# EAGLE board transceiver (2) (EAGLE 6.4)
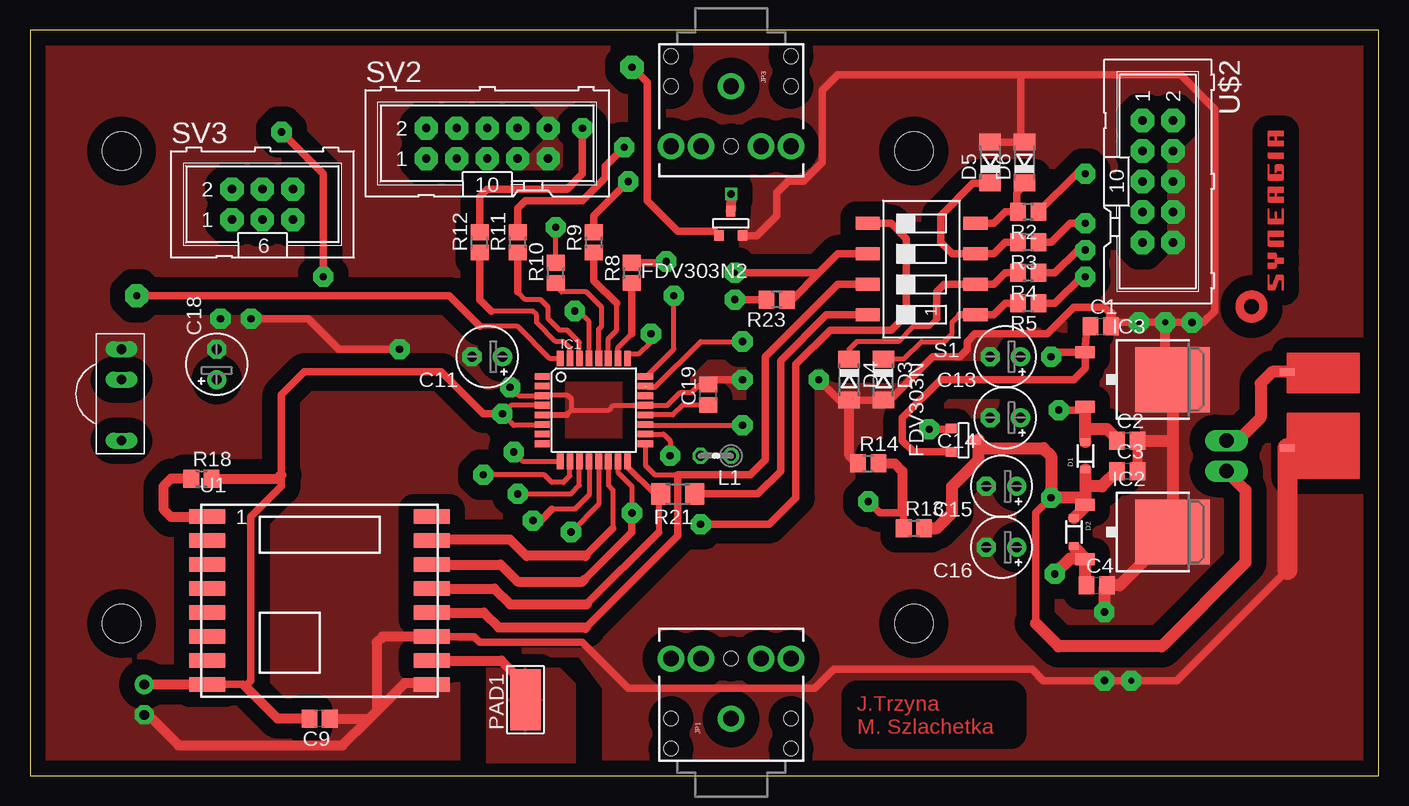
[diagram p0: board, top side]
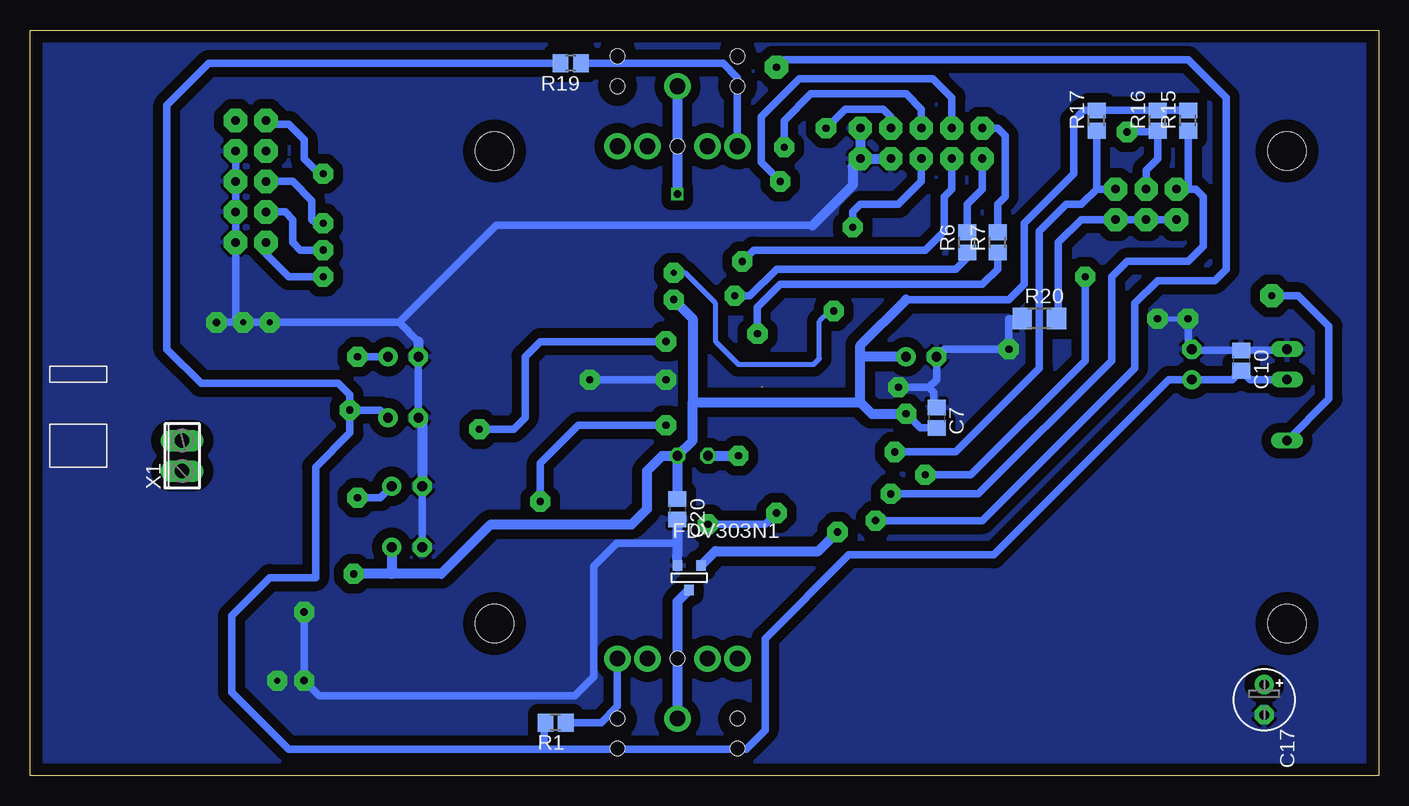
[diagram p1: board, bottom side, seen from below]

Size 112.38 x 62.15 mm. Coordinates in mm from the lower left corner, seen from the top.
Outline: 0,0 112.38,0 112.38,62.15 0,62.15 0,0
Copper layers (1*16): Top 0.035mm / dielectric 1.5mm / Bottom 0.035mm
Design rules "default": minimum track width 10mil, minimum drill 24mil, track to track 8mil, track to pad 8mil, pad to pad 8mil, via to via 8mil, smd to smd 8mil, copper to edge 40mil, drill to drill 8mil, minimum pad ring 10mil, minimum via ring 8mil, stop-mask expansion 4mil, vias tented up to drill 0mil, thermal gap 10mil
Holes 3.2 mm at 7.62,52.07 7.62,12.7 73.66,12.7 73.66,52.07

## Footprints (pad centres in the part's own frame; a part is rotated, then mirrored left to right if it is on the bottom)
C0805 = smd 1.3 x 1.5: 1 -0.85,0; 2 0.85,0
E2,5-5 = drill 0.813 pad 1.6: + -1.27,0 | drill 0.813 pad 1.6 octagon: - 1.27,0
SOD-323 = smd 0.63 x 0.83: 1 -1.15,0; 2 1.15,0
SOD80C = smd 1.4 x 1.8: A 1.7,0; C -1.7,0
SOT-23 = smd 0.787 x 0.889: 1 0.025,-1.016; 2 -0.94,1.016; 3 0.991,1.016
TQFP32-08 = smd 1.27 x 0.559: 1 -4.293,2.8; 2 -4.293,2; 3 -4.293,1.2; 4 -4.293,0.4; 5 -4.293,-0.4; 6 -4.293,-1.2; 7 -4.293,-2; 8 -4.293,-2.8; 17 4.293,-2.8; 18 4.293,-2; 19 4.293,-1.2; 20 4.293,-0.4; 21 4.293,0.4; 22 4.293,1.2; 23 4.293,2; 24 4.293,2.8 | smd 0.559 x 1.27: 9 -2.8,-4.293; 10 -2,-4.293; 11 -1.2,-4.293; 12 -0.4,-4.293; 13 0.4,-4.293; 14 1.2,-4.293; 15 2,-4.293; 16 2.8,-4.293; 25 2.8,4.293; 26 2,4.293; 27 1.2,4.293; 28 0.4,4.293; 29 -0.4,4.293; 30 -1.2,4.293; 31 -2,4.293; 32 -2.8,4.293
TO252 = smd 1 x 1.6: 1 -2.28,-4.8; 2 2.28,-4.8 | smd 5.4 x 6.2: 3 0,2.5
AUDIO-JACK = drill 1.3 pad 2.184: RING 5,5; RSH 5,2.5; SLEEVE 0,0; TIP 5,-5; TSH 5,-2.5 | hole 1.2: 0,5; -2.5,5; -2.5,-5; 0,-5; 5,0
0204V = drill 0.813 octagon: 1 -1.27,0; 2 1.27,0
5-2,5 = smd 2.54 x 5.08: 1 0,0
R0805 = smd 1.3 x 1.5: 1 -0.85,0; 2 0.85,0
R1206 = smd 1.6 x 1.803: 1 -1.422,0; 2 1.422,0
SMS-004 = smd 1.092 x 2.007: 1 -3.81,-4.496; 2 -1.27,-4.496; 3 1.27,-4.496; 4 3.81,-4.496; 5 3.81,4.496; 6 1.27,4.496; 7 -1.27,4.496; 8 -3.81,4.496
ML10 = drill 0.7 pad 1.93 octagon: 1 -5.08,-1.27; 2 -5.08,1.27; 3 -2.54,-1.27; 4 -2.54,1.27; 5 0,-1.27; 6 0,1.27; 7 2.54,-1.27; 8 2.54,1.27; 9 5.08,-1.27; 10 5.08,1.27
ML6 = drill 0.7 pad 1.93 octagon: 1 -2.54,-1.27; 2 -2.54,1.27; 3 0,-1.27; 4 0,1.27; 5 2.54,-1.27; 6 2.54,1.27
LED5MM = drill 0.813 octagon: A -1.27,0; K 1.27,0
TSOP17XX = drill 0.813 long: GND -3.81,0; OUT 3.81,0; V+ -1.27,0
RFM69W-XXXS2 = smd 3 x 1.2: 1 -9.35,7; 2 -9.35,5; 3 -9.35,3; 4 -9.35,1; 5 -9.35,-1; 6 -9.35,-3; 7 -9.35,-5; 8 -9.35,-7; 9 9.35,-7; 10 9.35,-5; 11 9.35,-3; 12 9.35,-1; 13 9.35,1; 14 9.35,3; 15 9.35,5; 16 9.35,7
DEANSM = smd 1.27 x 0.635: P$NEG 3.175,3.81; P$POS 3.175,-2.54
2POL254 = drill 1.2 long: 1 -1.27,0; 2 1.27,0

## Placement (x,y rotation side)
C1  [C0805]  89.22,37.46 0 top
C2  [C0805]  91.44,27.94 0 top
C3  [C0805]  91.44,25.4 0 top
C4  [C0805]  88.9,15.88 0 top
C7  [C0805]  36.83,29.84 270 bottom
C9  [C0805]  24.13,4.76 180 top
C10  [C0805]  11.43,34.61 270 bottom
C11  [E2,5-5]  38.1,34.92 180 top
C13  [E2,5-5]  81.28,34.92 180 top
C14  [E2,5-5]  81.28,29.84 180 top
C15  [E2,5-5]  80.96,24.13 180 top
C16  [E2,5-5]  80.96,19.05 180 top
C17  [E2,5-5]  9.53,6.35 270 bottom
C18  [E2,5-5]  15.56,34.29 90 top
C19  [C0805]  56.52,31.75 90 top
C20  [C0805]  58.42,22.22 270 bottom
D1  BAS16HT1G  [SOD-323]  87.95,26.67 90 top
D2  BAS16HT1G  [SOD-323]  87,20.32 270 top
D3  [SOD80C]  71.12,33.02 270 top
D4  [SOD80C]  68.26,33.02 270 top
D5  [SOD80C]  80.01,51.12 90 top
D6  [SOD80C]  82.87,51.12 90 top
FDV303N  [SOT-23]  77.79,27.94 90 top
FDV303N1  [SOT-23]  57.47,16.51 0 bottom
FDV303N2  [SOT-23]  58.42,46.04 180 top
IC1  MEGA8-AI  [TQFP32-08]  46.99,30.48 0 top
IC2  LF33  [TO252]  92.71,20.32 270 top
IC3  LF50  [TO252]  92.71,33.02 270 top
JP1  [AUDIO-JACK]  58.42,4.76 90 top
JP2  [AUDIO-JACK]  23.5,75.25 0 top  (outside the outline)
JP3  [AUDIO-JACK]  58.42,57.47 270 top
L1  [0204V]  57.15,26.67 180 top
PAD1  WIREPADSMD5-2,5  [5-2,5]  41.27,6.35 0 top
R1  36,5R  [R0805]  68.58,4.45 180 bottom
R2  [R0805]  83.19,46.99 180 top
R3  [R0805]  83.19,44.45 180 top
R4  [R0805]  83.19,41.91 180 top
R5  [R0805]  83.19,39.37 180 top
R6  1.2k  [R0805]  34.29,44.45 90 bottom
R7  1.2k  [R0805]  31.75,44.45 90 bottom
R8  1.2k  [R0805]  50.16,41.91 90 top
R9  1.2k  [R0805]  46.99,44.45 90 top
R10  1.2k  [R0805]  43.81,41.91 90 top
R11  1,2k  [R0805]  40.64,44.45 90 top
R12  1.2k  [R0805]  37.47,44.45 90 top
R13  10k  [R0805]  73.66,20.64 0 top
R14  3,6k  [R0805]  69.85,26.04 0 top
R15  10k  [R0805]  15.88,54.61 90 bottom
R16  10k  [R0805]  18.41,54.61 90 bottom
R17  10k  [R0805]  23.5,54.61 90 bottom
R18  10k  [R0805]  14.29,24.77 0 top
R19  [R0805]  67.31,59.37 180 bottom
R20  0R  [R1206]  28.26,38.1 0 bottom
R21  0R  [R1206]  53.98,23.49 180 top
R23  1k  [R0805]  62.23,39.69 180 top
S1  SWS004  [SMS-004]  74.3,42.23 90 top
SV2  [ML10]  38.1,52.7 0 top
SV3  [ML6]  19.37,47.62 0 top
TSAL6200  [LED5MM]  41.27,72.71 0 top  (outside the outline)
TSOP  TSOP1736  [TSOP17XX]  7.62,31.75 270 top
U1  RFM69HW  [RFM69W-XXXS2]  24.13,14.61 0 top
U$1  DEANS.MALE  [DEANSM]  107.95,31.11 180 top
U$2  [ML10]  93.98,49.53 270 top
U$3  [SYNERGIA_16MM]  104.46,37.78 90 top
X1  [2POL254]  99.69,26.67 90 bottom

## Library data of the parts
C1-C4 C7 C9 C10 C19 C20 L1 R1-R19 R23 = resistor
C11 C13-C18 R20 R21 = rcl
D1 D2 = SparkFun
D3-D6 = diode
FDV303N FDV303N1 FDV303N2 = zetex; OC_FARNELL: unknown; OC_NEWARK: unknown
IC1 = atmel; MPN: ATMEGA8-16AU; OC_FARNELL: 9171371; OC_NEWARK: 73M8863
IC2 IC3 = linear
JP1-JP3 = SparkFun-Connectors
PAD1 = wirepad
S1 = smd-special
SV2 SV3 U$2 = con-harting-ml; OC_FARNELL: unknown; OC_NEWARK: unknown
TSAL6200 = led
TSOP = tsop
U1 = SparkFun-RF
U$1 = bt_electromech
U$3 = synergia_logo
X1 = con-phoenix-254; OC_FARNELL: unknown; OC_NEWARK: unknown

## Nets
5V_ENABLE: FDV303N.3 IC1.23
+3V3: C4.1 C7.2 C9.2 C11.+ C16.+ C17.+ C20.1 D2.2 IC1.4 IC1.6 IC2.2 L1.1 R15.2 R16.2 R17.2 R18.2 R23.2 U1.8
+5V: C2.1 C10.2 C14.+ C18.+ D1.2 IC3.2 R1.2 R19.2 TSOP.V+
ADC: IC1.19 R13.1 R14.2
GND: C1.2 C2.2 C3.2 C4.2 C7.1 C9.1 C10.1 C11.- C13.- C14.- C15.- C16.- C17.- C18.- C19.2 C20.2 D3.A D4.A D5.A D6.A FDV303N1.2 FDV303N2.2 IC1.3 IC1.5 IC1.21 IC2.3 IC3.3 R14.1 R20.1 SV2.7 SV2.9 SV2.10 TSOP.GND U1.9 U1.11 U$1.P$NEG U$2.4 U$2.6 U$2.8 U$2.10
LED1: IC1.24 R6.1
LED2: IC1.25 R7.1
LED3: IC1.26 R8.1
LED4: IC1.27 R9.1
LED5: IC1.28 R10.1
LED_BATT_GR: IC1.30 R11.1
LED_BATT_RED: IC1.31 R12.1
LED_STRIPE: FDV303N2.3 IC1.12
MISO: IC1.16 R21.2 U1.13
MOSI: IC1.15 S1.5 U1.14
N$1: C1.1 C13.+ FDV303N.2 IC3.1
N$2: IC1.18 L1.2
N$3: JP2.TIP TSAL6200.A
N$4: R2.1 U$2.1
N$5: R3.1 U$2.5
N$6: R4.1 U$2.7
N$7: R5.1 U$2.9
N$8: JP1.TIP R1.1
N$9: R6.2 SV2.1
N$10: R7.2 SV2.2
N$11: R8.2 SV2.3
N$12: R9.2 SV2.4
N$13: R10.2 SV2.5
N$14: FDV303N1.1 JP1.SLEEVE
N$15: FDV303N2.1 JP3.SLEEVE
N$16: R11.2 SV2.6
N$17: R12.2 SV2.8
N$19: U$1.P$POS X1.2
N$20: JP3.TIP R19.1
N$21: R18.1 U1.1
N$22: JP2.SLEEVE TSAL6200.K
N$23: R20.2 SV3.1 SV3.3 SV3.5
N$24: R21.1 S1.8
N$26: C19.1 IC1.20
N$27: C3.1 C15.+ D1.1 D2.1 FDV303N.1 IC2.1 R13.2 X1.1
N$28: PAD1.1 U1.10
N$29: D6.C R2.2 S1.4
N$30: D5.C R3.2 S1.3
N$31: D4.C R4.2 S1.2
N$32: D3.C R5.2 S1.1
RESET: IC1.29 R23.1 S1.6
SCK: IC1.17 S1.7 U1.12
SS: IC1.14 U1.15
SWITCH_DOWN: IC1.11 R15.1 SV3.2
SWITCH_OK: IC1.10 R16.1 SV3.4
SWITCH_UP: IC1.9 R17.1 SV3.6
TSAL_ENABLE: FDV303N1.3 IC1.13
TSOP_OUT: IC1.32 TSOP.OUT

## Tracks (layer width: path | path; a pad name or v marks a point on that pad's centre or on a via)
5V_ENABLE  (via drill 0.6 pad 1.68)  (1 unrouted)
  Top 0.254: 51.38,32.38 51.44,32.38
  Top 0.406: 51.44,32.38 52.07,32.38 55.88,36.2 v59.37,36.2
  Top 0.61: FDV303N.3 76.73,28.89 v74.93,28.89
  Bottom 0.61: v59.37,36.2 69.85,36.2 71.12,34.92 71.12,29.84 72.07,28.89 v74.93,28.89
+3V3  (via drill 0.6 pad 1.68)
  Top 0.254: 14.79,7.62 U1.8
  Top 0.305: 87.91,18.25 IC2.2 | IC1.6 42.63,29.21
  Top 0.406: 42.63,29.21 40.32,29.21 v39.37,30.16 40.09,30.88 IC1.4
  Top 0.61: 14.79,7.62 17.78,7.62 17.94,7.46 18.41,7.94 18.41,21.59 20.95,24.13 20.95,25.08 20.95,31.75 22.86,33.66 34.29,33.66 37.78,30.16 v39.37,30.16 | 87.91,16.02 C4.1 | D2.2 87,18.95 | 87,18.95 IC2.2 | 87,18.95 87.09,18.95 | R23.2 v58.74,39.69
  Top 0.813: C9.2 20.64,4.76 17.94,7.46 | C17.+ 14.45,7.62 U1.8 | R18.2 20.64,24.77 20.95,25.08
  Top 1.016: IC2.2 87.91,16.02 | 87.09,18.95 87.95,18.1 86.68,18.1 v85.41,16.83
  Bottom 0.61: C7.2 38.2,28.99 v39.37,30.16 | 39.37,39.69 30.8,39.69 29.53,40.96 29.53,46.04 25.4,50.16 25.4,54.61 24.55,55.46 R17.2 R16.2 R15.2
  Bottom 0.813: L1.1 59.69,26.67 60.96,25.4 60.96,22.22 62.23,20.95 73.98,20.95 78.11,16.83 82.23,16.83 | L1.1 C20.1 | v58.74,39.69 57.15,38.1 57.15,31.11 | 43.18,31.11 42.23,30.16 v39.37,30.16 | 57.15,31.11 43.18,31.11 | L1.1 57.15,27.94 57.15,31.11 | 82.23,16.83 v85.41,16.83 | C16.+ 82.23,16.83 | 43.18,31.11 43.18,34.92 | 43.18,34.92 43.18,35.88 39.37,39.69 | C11.+ 43.18,34.92
+5V  (via drill 0.6 pad 1.68)
  Top 0.254: IC3.2 87.65,30.48 | 90.59,28.06 C2.1
  Top 0.61: v85.72,30.48 87.65,30.48 arc90 IC3.2 arc90 87.95,30.78
  Top 1.016: D1.2 87.95,28.89 | 87.95,28.89 87.95,30.78 | 90.59,28.06 89.76,28.89 87.95,28.89
  Bottom 0.61: C14.+ 83.19,30.48 v85.72,30.48 | v85.72,30.48 85.72,28.57 88.58,25.72 88.58,16.51 92.39,16.51 95.57,13.34 95.57,6.99 90.81,2.22 69.53,2.22 | v85.72,30.48 85.72,31.75 86.68,32.7 98.11,32.7 100.97,35.56 100.97,55.88 97.47,59.37 R19.2 | 69.53,2.22 52.7,2.22 51.12,3.81 51.12,11.43 44.13,18.41 32.07,18.41 17.46,33.02 C18.+ 12.17,33.02 C10.2 10.69,33.02 TSOP.V+ | R1.2 69.53,4.23 69.53,2.22
ADC  (via drill 0.6 pad 1.68)
  Top 0.305: IC1.19 51.35,29.21
  Top 0.406: 51.35,29.21 v59.37,29.21
  Top 0.61: R13.1 72.81,21.91 72.71,21.91 70.8,21.91 v69.85,22.86
  Top 0.813: 72.71,21.91 72.71,25.4 72.07,26.04 R14.2
  Bottom 0.61: v69.85,22.86 69.85,26.04 66.67,29.21 v59.37,29.21
GND  (via drill 0.5 pad 1.68, 0.6 pad 1.68)
  Top 0.254: 90.13,16.51 C4.2 | 40.64,31.75 40.71,31.68
  Top 0.305: 93.94,20.32 IC2.3 | IC3.3 95.21,31.75 | C19.2 56.73,33.02
  Top 0.406: 40.71,31.68 IC1.3 | 40.64,31.75 v40.01,32.38 | 45.09,30.48 48.26,30.48 48.66,30.88 IC1.21 53.1,30.88 54.19,31.96 55.14,31.96 55.78,32.6 | 44.69,30.08 44.77,30.16 45.09,30.48 | 42.77,31.75 44.77,31.75 45.09,31.43 45.09,30.48 | 46.99,10.16 47.31,9.84
  Top 0.508: IC1.5 44.77,30.08 44.77,30.16 | 42.77,31.75 IC1.3
  Top 0.61: 93.94,20.32 93.94,19.01 | 90.07,38.52 89.53,39.05 87,39.05 84.77,36.83 78.74,36.83 78.11,36.2 78.11,35.56 77.47,34.92 75.25,34.92 71.64,31.32 D3.A D4.A 67.42,31.32 v65.72,33.02 | D5.A D6.A 82.55,52.82 82.55,58.42 | 89.75,37.78 89.85,37.78 v92.39,37.78 v94.61,37.78 v96.84,37.78 97.79,37.78 98.74,38.73 98.74,55.56 95.89,58.42 82.55,58.42 | v30.8,35.56 25.72,35.56 23.18,38.1 v18.41,38.1 | 56.73,33.02 v59.37,33.02 | 104.78,17.14 95.57,7.94 v91.76,7.94 v89.53,7.94 84.45,7.94 83.5,8.89 66.99,8.89 65.41,7.3 49.85,7.3 47.31,9.84 46.04,11.11 37.47,11.11 36.97,11.61 U1.11 | FDV303N2.2 60.58,45.02 62.23,46.67 62.23,48.58 63.18,49.53 64.45,49.53 66.04,51.12 66.04,57.15 67.31,58.42 82.55,58.42
  Top 0.813: C9.1 28.26,4.76 | C17.- 9.84,5.08 12.38,2.54 26.04,2.54 28.26,4.76 | 28.89,5.4 31.22,7.72 33.36,7.72 U1.9 | U1.11 29.39,11.61 28.89,11.11 28.89,5.4 | 28.89,5.4 28.26,4.76 | R14.1 68.26,26.77 D4.A | 90.07,38.52 C1.2 89.85,37.68 89.85,37.78 | IC3.3 94.61,33.62 v94.61,37.78 | C2.2 C3.2
  Top 1.016: 93.94,19.01 90.81,15.88 C4.2 | 95.21,31.75 95.21,27.94 | 95.21,27.94 95.21,20 | C2.2 95.21,27.94 | 89.53,15.66 v89.53,13.65
  Top 1.676: U$1.P$NEG 104.78,17.14
  Bottom 0.305: 37.05,30.7 C7.1 36.83,30.48
  Bottom 0.406: v18.41,38.1 v15.88,38.1
  Bottom 0.61: C15.- C16.- | C13.- C14.- 79.69,30.16 | U$2.4 U$2.6 U$2.8 U$2.10 95.25,37.78 | 95.25,37.78 v94.61,37.78 v92.39,37.78 81.6,37.78 | 95.25,37.78 v96.84,37.78 | 80.01,36.2 81.6,37.78 | v40.01,32.38 37.47,32.38 | 37.47,32.38 36.83,33.02 C11.- 36.2,35.56 v30.8,35.56 30.8,38.1 R20.1 | 37.05,30.7 37.05,31.96 37.47,32.38 | v59.37,33.02 v65.72,33.02 | v89.53,13.65 v89.53,7.94 88.27,6.67 66.99,6.67 65.41,8.25 65.41,17.46 63.5,19.37 58.42,19.37 | TSOP.GND 7.72,35.46 C10.1 15.46,35.46 C18.- 15.88,35.88 v15.88,38.1 | 47.15,45.88 73.5,45.88 81.6,37.78
  Bottom 0.813: SV2.10 SV2.9 | SV2.9 43.81,50.8 43.81,49.21 47.15,45.88 | SV2.9 SV2.7 | C14.- 79.69,29.53 C15.- | 80.01,36.2 C13.- | FDV303N1.2 58.42,18.47 58.42,19.37 C20.2
  pour Bottom (isolate 0.813): 0,62.55 113.03,62.23 112.71,0 0,0
  pour Top (isolate 1.27, no thermals): -1.59,64.14 -1.59,-2.22 117.16,-1.59 117.16,63.18
LED1  (via drill 0.6 pad 1.68)
  Top 0.305: IC1.24 51.38,33.28
  Top 0.406: 51.38,33.28 53.66,35.56 v53.66,40.01
  Bottom 0.406: R6.1 34.29,43.18
  Bottom 0.61: 34.29,43.18 35.24,42.23 50.16,42.23 52.39,40.01 v53.66,40.01
LED2  (via drill 0.6 pad 1.68)
  Top 0.305: IC1.25 49.79,35.19
  Top 0.406: 49.79,35.19 50.74,35.19 51.75,36.2 v51.75,36.83
  Bottom 0.61: v51.75,36.83 51.75,39.05 49.85,40.96 33.02,40.96 31.75,42.23 R7.1
LED3
  Top 0.406: IC1.26 48.99,35.66 50.16,36.83
  Top 0.61: 50.16,36.83 R8.1
LED4
  Top 0.406: IC1.27 48.19,36.44 48.9,37.15 48.9,39.37
  Top 0.61: 48.9,39.37 46.99,41.27 R9.1
LED5
  Top 0.406: R10.1 43.88,40.74 44.3,40.32 46.35,40.32 47.62,39.05 47.62,37.46 47.39,37.23 IC1.28
LED_BATT_GR
  Top 0.406: IC1.30 45.79,36.12 44.77,37.15 44.13,37.15 43.18,38.1 43.18,39.05 42.55,39.69 41.27,39.69 40.64,40.32
  Top 0.61: 40.64,40.32 R11.1
LED_BATT_RED
  Top 0.406: IC1.31 44.99,35.66 44.45,36.2 43.81,36.2 42.23,37.78 42.23,38.42 41.91,38.73 38.42,38.73
  Top 0.61: R12.1 37.47,39.69 38.42,38.73
LED_STRIPE  (via drill 0.6 pad 1.68, 0.6 pad 1.93)
  Top 0.406: IC1.12 46.59,23.41 45.4,22.22 43.5,22.22
  Top 0.61: 43.5,22.22 42.55,21.27 v41.91,21.27 | FDV303N2.3 57.05,45.4 53.98,45.4 51.44,47.94 51.44,57.78 v50.16,59.05
  Bottom 0.61: v41.91,21.27 33.02,21.27 20.32,33.97 20.32,39.37 18.41,41.27 13.65,41.27 12.7,42.23 12.7,56.52 15.88,59.69 49.53,59.69 v50.16,59.05
MISO
  Top 0.305: 49.94,26.04 IC1.16 49.79,26.09
  Top 0.508: 49.79,26.09 49.79,25.77 52.07,23.49 | 52.07,23.49 R21.2 | 52.07,23.49 52.39,23.18 52.39,20.32
  Top 0.61: 46.4,14.34 52.39,20.32
  Top 0.813: U1.13 38.69,15.61 40.01,14.29 46.35,14.29 46.4,14.34
MOSI  (via drill 0.6 pad 1.68)
  Top 0.406: IC1.15 48.99,25.3 50.16,24.13 v50.16,21.91
  Top 0.61: v55.88,20.95 61.59,20.95 63.82,23.18 63.82,34.29 66.67,37.15 71.75,37.15 73.03,38.42 73.03,44.77 71.75,46.04 S1.5 | 46.18,16.34 50.16,20.32 v50.16,21.91
  Top 0.813: U1.14 39.23,17.61 40.64,16.19 46.04,16.19 46.18,16.34
  Bottom 0.61: v50.16,21.91 51.12,20.95 v55.88,20.95
N$1  (via drill 0.6 pad 1.68)
  Top 0.254: C1.1 87.91,37.96
  Top 0.305: IC3.1 87.65,35.56
  Top 0.61: C1.1 88.05,37.2 IC3.1 | v85.09,34.92 85.72,35.3 IC3.1 | IC3.1 87.95,35.26 87.95,33.97 87,33.02 75.88,33.02 72.71,29.84 72.71,27.94 73.66,26.99 76.76,26.99 FDV303N.2
  Bottom 0.61: v85.09,34.92 C13.+
N$2  (via drill 0.6 pad 1.68)
  Top 0.406: IC1.18 52.8,28.48 53.34,27.94 v53.34,26.67
  Bottom 0.813: L1.2 v53.34,26.67
N$3  (1 unrouted)
N$4  (via drill 0.6 pad 1.68)
  Top 0.61: R2.1 87.21,50.16 v87.95,50.16
  Bottom 0.61: U$2.1 92.39,54.29 90.81,54.29 89.53,53.02 89.53,51.44 88.27,50.16 v87.95,50.16
N$5  (via drill 0.6 pad 1.68)
  Top 0.61: R3.1 85.09,44.45 86.68,46.04 v87.95,46.04
  Bottom 0.61: U$2.5 90.49,49.53 88.9,47.94 88.9,46.35 88.58,46.04 v87.95,46.04
N$6  (via drill 0.6 pad 1.68)
  Top 0.61: R4.1 85.41,41.91 87.31,43.81 v87.95,43.81
  Bottom 0.61: v87.95,43.81 89.85,43.81 90.49,44.45 90.49,46.35 91.12,46.99 U$2.7
N$7  (via drill 0.6 pad 1.68)
  Top 0.61: R5.1 85.41,39.37 87.63,41.59 v87.95,41.59
  Bottom 0.61: v87.95,41.59 90.81,41.59 92.71,43.5 U$2.9
N$8
  Bottom 0.61: R1.1 64.77,4.45 63.42,5.79 JP1.TIP
N$9
  Bottom 0.61: R6.2 34.29,47.62 33.02,48.89 SV2.1
N$10
  Bottom 0.61: SV2.2 31.75,53.98 31.43,53.66 31.11,53.34 31.11,48.26 31.75,47.62 R7.2
N$11  (via drill 0.6 pad 1.68)
  Top 0.406: 52.92,42.76 v53.02,42.86
  Top 0.61: R8.2 52.92,42.76
  Bottom 0.61: v53.02,42.86 52.07,43.81 37.78,43.81 36.2,45.4 36.2,48.26 35.56,48.89 SV2.3
N$12  (via drill 0.6 pad 1.68)
  Top 0.61: R9.2 46.99,46.67 v49.85,49.53
  Bottom 0.61: SV2.4 35.56,56.52 37.15,58.1 48.26,58.1 51.44,54.93 51.44,51.12 v49.85,49.53
N$13  (via drill 0.6 pad 1.68)
  Top 0.406: R10.2 v43.81,45.72
  Bottom 0.61: v43.81,45.72 43.81,46.99 43.18,47.62 40.01,47.62 38.1,49.53 SV2.5
N$14
  Bottom 0.813: FDV303N1.1 58.42,14.52 JP1.SLEEVE
N$15  (via drill 0.6)
  Top 0.813: v58.42,48.49 FDV303N2.1
  Bottom 0.813: JP3.SLEEVE v58.42,48.49
N$16  (via drill 0.6 pad 1.68)
  Top 0.61: v49.53,52.39 47.94,50.8 47.94,49.85 46.04,47.94 41.27,47.94 40.64,47.31 R11.2
  Bottom 0.61: SV2.6 38.1,55.56 39.37,56.83 47.31,56.83 49.53,54.61 v49.53,52.39
N$17  (via drill 0.6 pad 1.68)
  Top 0.61: R12.2 37.47,48.26 38.1,48.89 44.77,48.89 46.04,50.16 v46.04,53.98
  Bottom 0.61: SV2.8 40.64,54.93 41.27,55.56 44.45,55.56 v46.04,53.98
N$18
  cutout Top: 35.88,9.84 35.88,-0.32 36.83,-0.32 36.83,9.21 37.15,9.53 44.45,9.53 46.35,7.62 46.35,0 46.67,-0.32 47.62,-0.32 47.62,7.3 45.72,9.84
N$19
  Top 1.016: U$1.P$POS 103.5,33.66 102.55,32.7 102.55,29.84 100.65,27.94 X1.2
N$20
  Bottom 0.61: JP3.TIP 53.42,58.18 54.61,59.37 R19.1
N$21
  Top 0.813: R18.1 11.75,24.77 11.11,24.13 11.11,22.22 11.75,21.59 14.77,21.59 U1.1
N$22  (1 unrouted)
N$23
  Bottom 0.61: SV3.1 SV3.3 SV3.5 24.77,46.35 26.67,44.45 26.67,38.27 R20.2
N$24
  Top 0.61: S1.8 66.36,38.42 62.55,34.61 62.55,25.4 60.64,23.49 R21.1
N$26
  Top 0.406: IC1.20 53.58,30.08 54.4,30.9 C19.1
N$27  (via drill 0.6 pad 1.68)
  Top 0.305: 87.91,22.38 IC2.1 87.95,22.56
  Top 0.61: 87.95,22.56 arc90 IC2.1 87.33,23.18 | v85.09,23.18 83.82,21.91 83.82,12.7 | 79.38,27.3 79.06,26.99
  Top 0.813: FDV303N.1 78.87,28.03 79.06,28.03
  Top 1.016: D2.1 87.91,22.38 | 87.95,24.13 87.95,22.56 | C3.1 89.32,24.13 87.95,24.13 | 79.38,27.3 84.45,27.3 85.09,26.67 v85.09,23.18 87.33,23.18 | 83.82,12.7 85.72,10.8 94.3,10.8 101.28,17.78 101.28,23.81 X1.1 | 79.06,28.03 79.06,26.99 79.06,26.35 76.83,24.13 76.83,21.91 75.56,20.64 R13.2 | D1.1 87.95,24.13
  Bottom 0.61: C15.+ 83.19,23.18 v85.09,23.18
N$28
  Top 0.813: U1.10 39.29,9.61 41.27,7.62 PAD1.1
  pour Top (isolate 0.813): 38.1,8.89 38.1,-0.63 45.4,-0.63 45.4,7.62 44.13,8.89
N$29
  Top 0.61: S1.4 80.33,46.04 81.28,46.99 R2.2 82.23,47.09 82.23,48.58 82.87,49.21 D6.C
N$30
  Top 0.406: D5.C 79.96,49.37
  Top 0.61: R3.2 81.28,44.45 80.33,43.5 S1.3 76.83,43.5 75.88,44.45 75.88,46.67 78.58,49.37 79.96,49.37
N$31
  Top 0.406: 75.56,38.1 74.93,37.46 73.66,37.46 72.39,36.2 68.9,36.2 68.26,35.56 D4.C
  Top 0.61: 75.56,38.1 75.56,40.32 76.2,40.96 S1.2 80.33,40.96 81.28,41.91 R4.2
N$32
  Top 0.406: 77.47,38.42 76.83,37.78 76.83,36.83 76.2,36.2 74.3,36.2 72.82,34.72 D3.C
  Top 0.61: 77.47,38.42 S1.1 80.33,38.42 81.28,39.37 R5.2
RESET  (via drill 0.5 pad 1.68, 0.6 pad 1.68)
  Top 0.406: IC1.29 46.59,37.87 45.72,38.73 v45.4,38.73 | 63.5,39.69 R23.1
  Top 0.61: S1.6 67.31,43.5 65.72,41.91 | 65.72,41.91 63.5,39.69 | v58.74,41.91 65.72,41.91
  Bottom 0.406: v45.4,38.73 45.72,38.73 46.59,37.87 IC1.29 47.07,34.29 53.34,34.29 55.24,36.2 55.24,39.37 57.78,41.91 v58.74,41.91
SCK
  Top 0.406: IC1.17 51.28,25.87 52.07,25.08 53.98,25.08
  Top 0.61: S1.7 67.31,40.96 61.28,34.92 61.28,26.35 60.01,25.08 53.98,25.08 53.98,20 46.31,12.34
  Top 0.813: U1.12 37.83,13.61 39.05,12.38 46.26,12.38 46.31,12.34
SS
  Top 0.406: IC1.14 48.19,24.2 48.58,23.81 48.58,20.64
  Top 0.61: 48.58,20.64 46.27,18.34
  Top 0.813: 46.27,18.34 41.35,18.34 40.01,19.68 33.56,19.68 U1.15
SWITCH_DOWN  (via drill 0.6 pad 1.68)
  Top 0.305: IC1.11 45.72,26.12
  Top 0.406: v40.64,23.49 45.09,23.49 45.79,24.2 IC1.11
  Bottom 0.406: 15.88,48.89 SV3.2
  Bottom 0.61: v40.64,23.49 33.34,23.49 22.23,34.61 22.23,41.59 20.95,42.86 15.88,42.86 14.61,44.13 14.61,48.26 15.24,48.89 SV3.2 | R15.1 15.88,48.89
SWITCH_OK  (via drill 0.6 pad 1.68)
  Top 0.406: v37.78,25.08 42.86,25.08 43.5,24.45 44.45,24.45 44.99,24.99 IC1.10
  Top 0.61: v20.95,53.66 24.45,50.16 v24.45,41.59
  Bottom 0.61: v37.78,25.08 33.97,25.08 24.45,34.61 v24.45,41.59 | 18.41,53.66 v20.95,53.66 | SV3.4 19.37,50.48 18.41,51.44 18.41,53.66 | 18.41,53.66 R16.1
SWITCH_UP  (via drill 0.6 pad 1.68)
  Top 0.406: IC1.9 41.12,26.19 v40.32,26.99
  Bottom 0.61: v40.32,26.99 35.24,26.99 28.26,33.97 28.26,45.4 26.04,47.62 24.77,47.62 23.5,48.89 | SV3.6 23.5,48.89 | 23.5,48.89 R17.1
TSAL_ENABLE  (via drill 0.6 pad 1.68)
  Top 0.406: IC1.13 47.39,22.62 v45.09,20.32
  Bottom 0.813: FDV303N1.3 55.27,18.73 46.67,18.73 v45.09,20.32
TSOP_OUT  (via drill 0.6 pad 1.93)
  Top 0.406: IC1.32 43.33,34.77 40.64,37.46 37.47,37.46
  Top 0.61: 37.47,37.46 34.92,40.01 v8.89,40.01
  Bottom 0.61: TSOP.OUT 4.13,31.43 4.13,37.46 6.67,40.01 v8.89,40.01

## Text on the board
Top: J.Trzyna / M. Szlachetka